# Altium PCB GSM_PCB_V4.PcbDoc
Units mm, origin at the board's own origin, x right, y up, seen from the top; angles counter-clockwise.
Board outline 55 x 60 mm, 2 copper layers (Top Layer, Bottom Layer), stack 1.569 mm thick; 82 components, 76 nets, 269 pads, 84 vias.
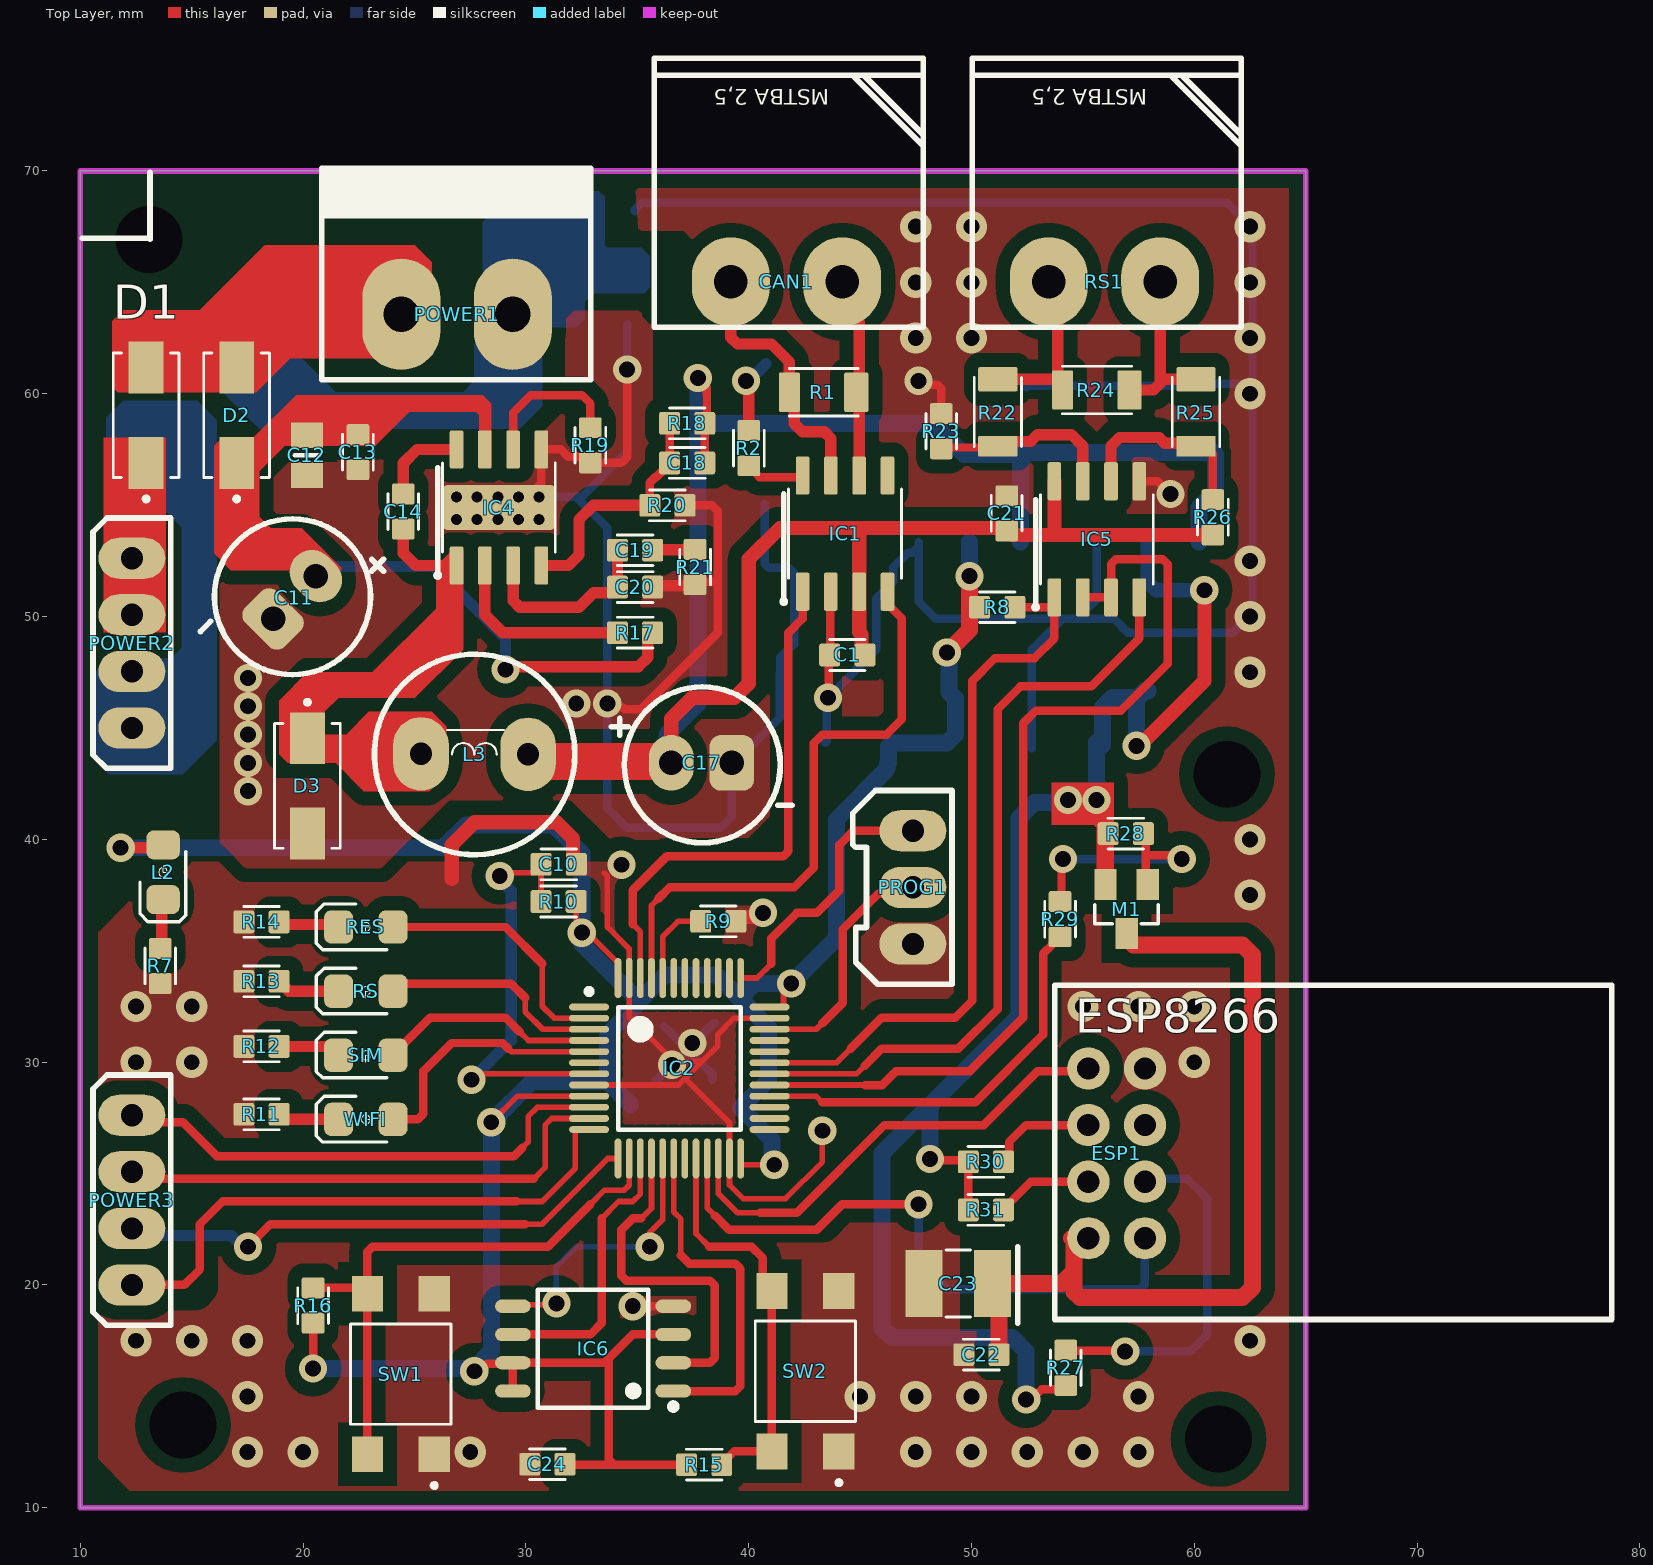
[diagram p0: Top Layer view]
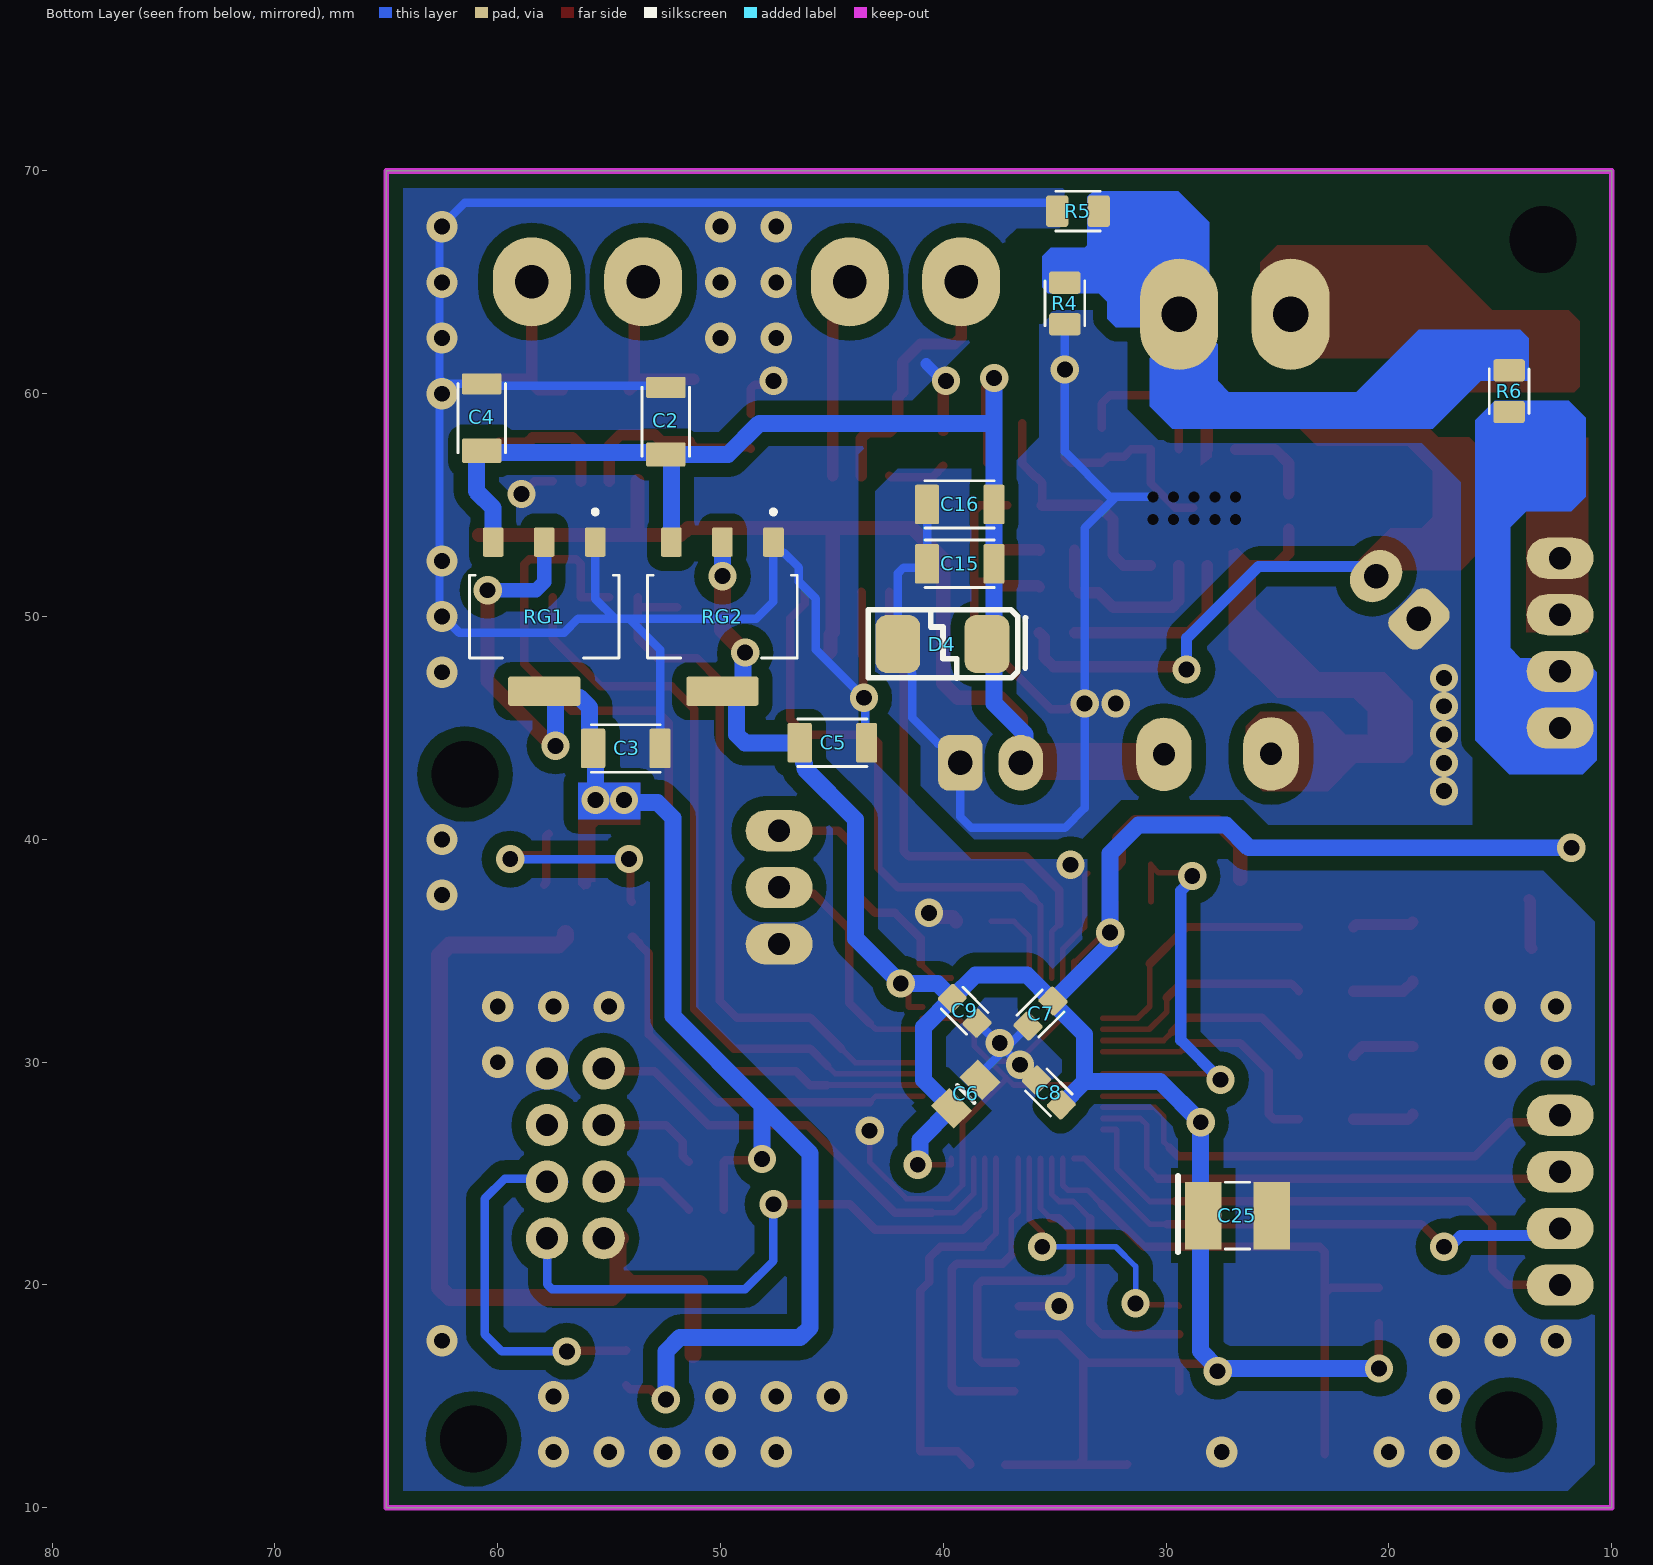
[diagram p1: Bottom Layer view, seen from below]
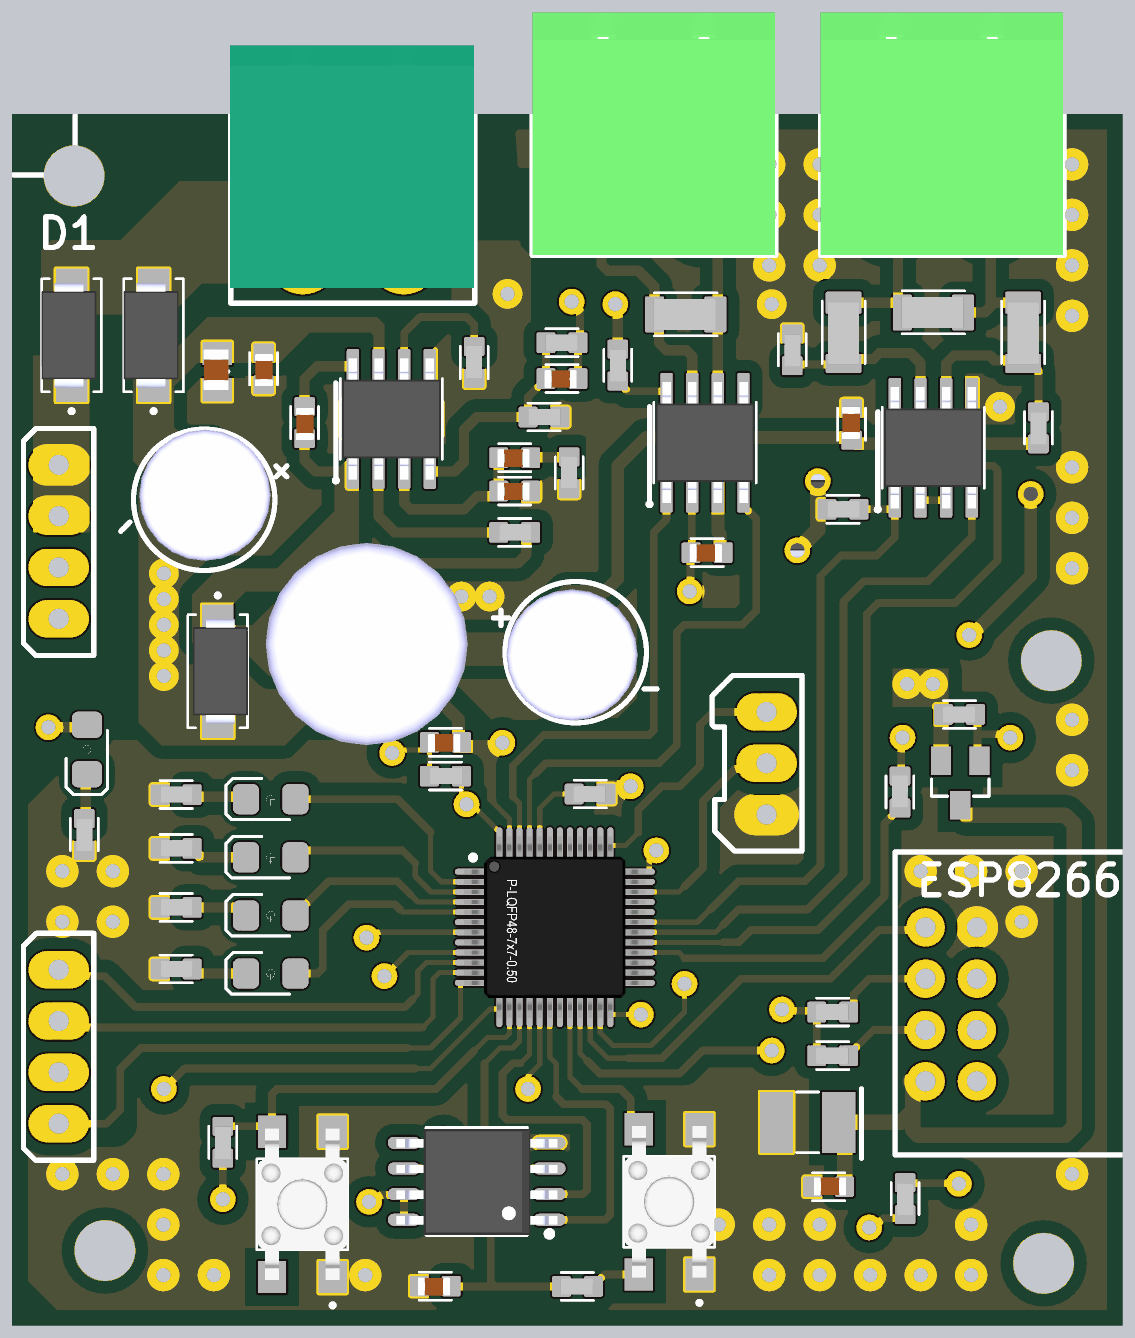
[diagram p2: 3D render of the assembled board from above, using the file's embedded part models]
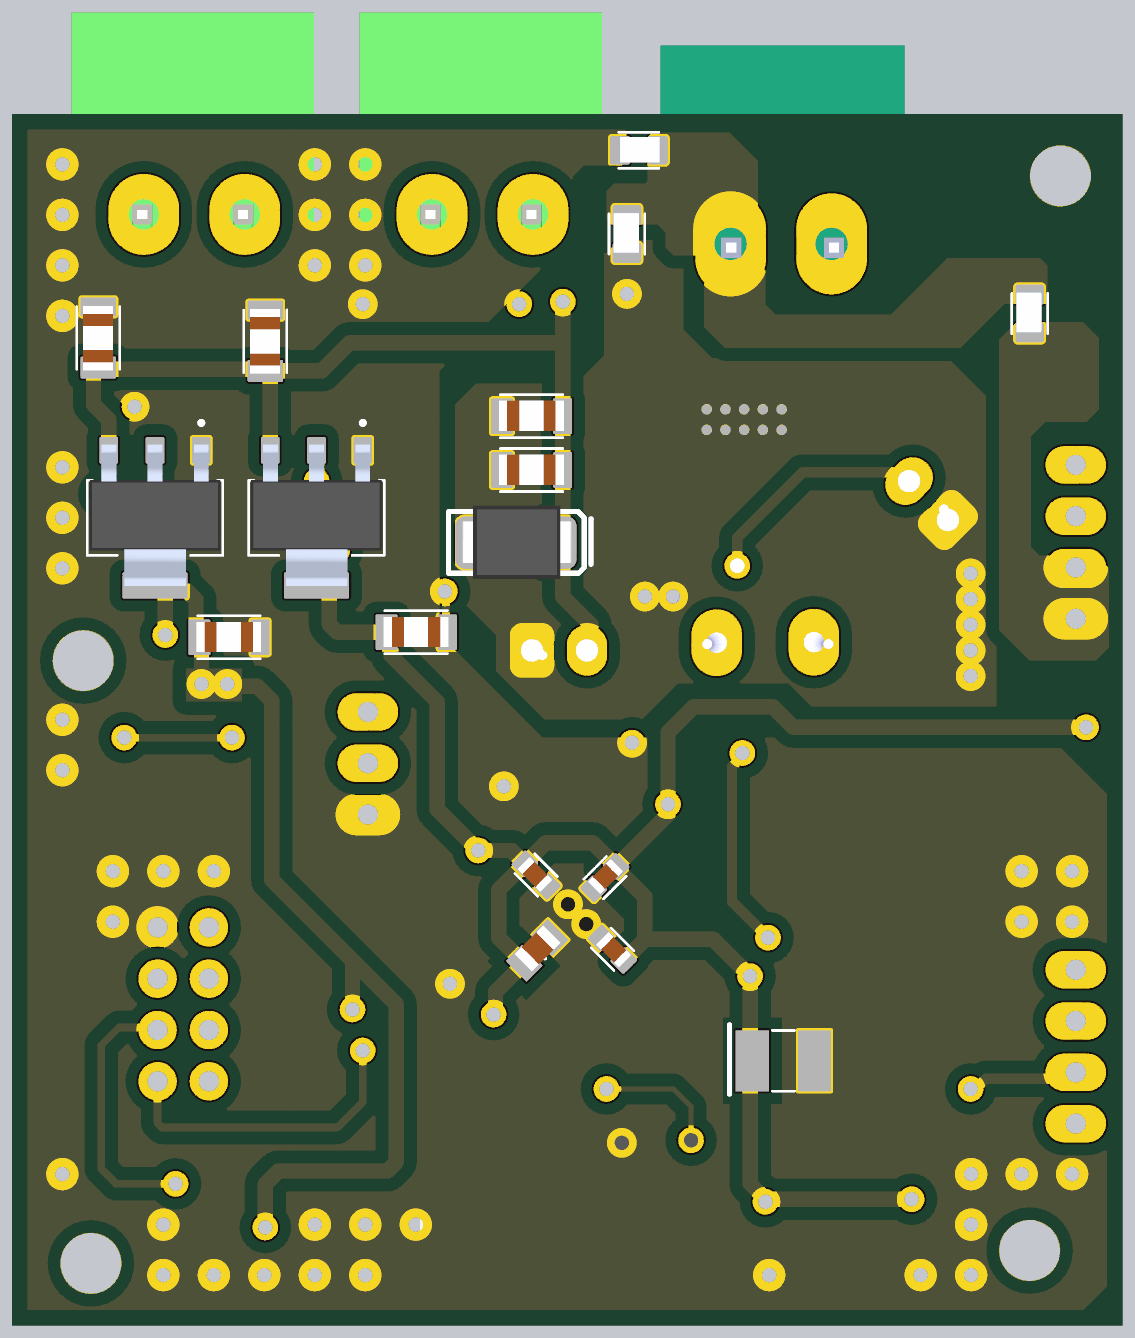
[diagram p3: 3D render of the assembled board from below, using the file's embedded part models]

## Layer stack, top to bottom
Top Solder: solder mask 0.0254, SM-001, Dk 4
Top Layer: signal copper 0.035
Dielectric 1: core 1.4986, Core-043, Dk 4.3
Bottom Layer: signal copper 0.035
Bottom Solder: solder mask 0.0254, SM-001, Dk 4

## Board outline
10,10 10,70 65,70 65,10

## Design rules (kind name [scope] priority, off if disabled: settings)
Clearance Clearance_1 [InPolygon] p1: gap=0.635 ignorepadtopadclearanceinfootprint=FALSE
Clearance [All] p2: gap=0.178 ignorepadtopadclearanceinfootprint=FALSE
PolygonConnect [All] p1: connectstyle=Direct reliefconductorwidth=0.254 reliefentries=4 polygonreliefangle="90 Angle" airgapwidth=0.254
RoutingVias [All] p1: holewidth=0.711 width=1.27 viastyle="Through Hole" minholewidth=0.711 minwidth=1.27 maxholewidth=0.711 maxwidth=1.27
SolderMaskExpansion [All] p1: expansion=0.102 istentingtop=FALSE
Width [All] p1: maxlimit=2.54 minlimit=0.254 preferedwidth=0.254 minimp=50.000000 maximp=50.000000 favimp=50.000000
30 further rules are at their usual default settings.

## Classes and differential pairs
component class U_WIFI: C22 C23 ESP1 M1 R27 R28 R29 R30 R31
component class U_spi_flash: C24 IC6
component class U_rs485: C21 IC5 R22 R23 R24 R25 R26
component class U_POWER: C11 C12 C13 C14 C15 C16 C17 C18 C19 C20 D3 D4 IC4 L3 R17 R18 R19 R20 R21
component class U_mcu: C6 C7 C8 C9 C10 IC2 PROG1 R9 R10 R11 R12 R13 R14 R15 R16 RES RS SIM SW1 SW2 WIFI
component class U_can: C1 IC1 R1 R2
component class MAIN: C2 C3 C4 C5 C25 CAN1 D1 D2 L2 POWER1 POWER2 POWER3 R4 R5 R6 R7 R8 RG1 RG2 RS1

## Components (designator, comment, footprint, x,y, rotation, side; value= is the part's Value field where it differs from the comment)
C1 "100nF" CAP-0603 44.323,48.26 r180 top
C2 "10uF" CAP-1206 52.312,58.765 r90 bottom
C3 "10uF" CAP-1206 54.229,43.942 r180 bottom
C4 "10uF" CAP-1206 60.579,58.928 r90 bottom
C5 "10uF" CAP-1206 44.958,44.196 r180 bottom
C6 "1uF" CAP-0805 38.321,29.212 r315 bottom
C7 "100nF" CAP-0603 35.576,32.266 r135 bottom
C8 "100nF" CAP-0603 35.179,28.575 r225 bottom
C9 "100nF" CAP-0603 39.124,32.369 r45 bottom
C10 "2.2nF" CAP-0603 31.369,38.862 r180 top
C11 "100/35V" cap/330u/16v 18.651,49.893 r45 top
C12 "2.2uF" CAP-0805 20.193,58.166 r270 top
C13 "100nF" CAP-0603 22.479,57.277 r270 top
C14 "100nF" CAP-0603 24.511,54.61 r270 top
C15 "NU" CAP-1206 39.243,52.227 r180 bottom
C16 "22uF" CAP-1206 39.243,54.894 r180 bottom
C17 "100uF/16v" cap/330u/16v 39.243,43.434 r180 top
C18 "NU" CAP-0603 37.136,56.879 r180 top
C19 "100pF" CAP-0603 34.798,52.959 r180 top
C20 "NU" CAP-0603 34.798,51.308 r180 top
C21 "100nF" CAP-0603 51.562,54.737 r90 top
C22 "100nF" CAP-0603 50.546,16.891 r0 top
C23 "100UF-16V B" CAP_TANTAL_B 49.403,20.066 r180 top
C24 "100nF" CAP-0603 30.861,11.938 r180 top
C25 "100UF-16V B" CAP_TANTAL_B 26.797,23.114 r180 bottom
CAN1 "conector_2pin_power" "MSTBA 2,5" 39.196,65.024 r0 top
D1 "M7" DIOD/1N4007/SMD 12.954,56.877 r90 top
D2 "M7" DIOD/1N4007/SMD 17.018,56.877 r90 top
D3 "US1M" DIOD/1N4007/SMD 20.193,44.558 r270 top
D4 "5V" TVS-5V-SMD 42.037,48.768 r180 bottom
ESP1 "Esp8266" ESP8266 55.245,22.098 r0 top
IC1 "MCP2551" SOP-8 44.45,54.102 r90 top
IC2 "STM32F103C8T6" LQFP48-7x7-0.50 36.703,29.718 r0 top
IC4 "MP4560DN" SOP8_HIT 26.924,52.324 r90 top
IC5 "SN65LBC184D" SOP-8 55.753,53.848 r90 top
IC6 "W25QXX" SOIC-8PIN-280MIL 33.02,17.145 r180 top
L2 "G" LED/0805 13.716,37.301 r90 top
L3 "100uH" inductor-9*12 25.299,43.84 r0 top locked
M1 "AO340" AO3401A 56.835,37 r180 top
POWER1 "" CONECTOR/FONIX/2PIN 29.337,63.627 r180 top
POWER2 "" CONECTOR/XH/4PIN 12.319,45 r90 top locked
POWER3 "" CONECTOR/XH/4PIN 12.319,20 r90 top
PROG1 "XH3" XH3 47.347,35.33 r90 top
R1 "120" RES/1206 43.362,60.202 r180 top
R2 "10K" RES/0603 40.005,57.658 r90 top
R4 "0R" RES/0805 35.477,65.102 r270 bottom
R5 "0R" RES/0805 32.907,69.132 r0 bottom
R6 "0R" RES/0805 15.538,61.165 r270 bottom
R7 "2.2K" RES/0603 13.589,34.417 r90 top
R8 "1K" RES/0603 51.054,50.419 r180 top
R9 "0R" RES/0603 38.735,36.322 r0 top
R10 "4.7k" RES/0603 31.369,37.211 r180 top
R11 "1.5K" RES/0603 18.034,27.659 r180 top
R12 "1.5K" RES/0603 18.034,30.707 r180 top
R13 "1.5K" RES/0603 18.034,33.628 r180 top
R14 "1.5K" RES/0603 18.034,36.295 r180 top
R15 "1.5K" RES/0603 38.1,11.938 r0 top
R16 "1.5K" RES/0603 20.447,19.177 r90 top
R17 "47K" RES/0603 34.798,49.276 r180 top
R18 "220K" RES/0603 37.338,58.674 r0 top
R19 "470k" RES/0603 32.893,57.587 r270 top
R20 "42.2K" RES/0603 36.251,54.991 r180 top
R21 "47K" RES/0603 37.592,52.126 r270 top
R22 "10R" RES/1206 51.054,59.182 r270 top
R23 "1K" RES/0603 48.641,58.42 r90 top
R24 "120" RES/1206 55.626,60.299 r180 top
R25 "10R" RES/1206 59.944,59.182 r270 top
R26 "1K" RES/0603 60.833,54.554 r90 top
R27 "1K" RES/0603 54.229,16.383 r90 top
R28 "100K" RES/0603 57.023,40.259 r0 top
R29 "100R" RES/0603 53.975,36.322 r270 top
R30 "1K" RES/0603 50.744,25.527 r0 top
R31 "1K" RES/0603 50.744,23.368 r0 top
RES "" LED/0805 21.59,36.068 r0 top
RG1 "AMS1117" AMS1117 57.912,50.249 r270 bottom
RG2 "AMS1117" AMS1117 49.915,50.249 r270 bottom locked
RS "" LED/0805 21.59,33.189 r0 top
RS1 "conector_2pin_power" "MSTBA 2,5" 53.467,65.024 r0 top
SIM "" LED/0805 21.59,30.31 r0 top
SW1 "" micro_switch_smd 24.384,16.002 r90 top
SW2 "" micro_switch_smd 42.545,16.129 r90 top
WIFI "" LED/0805 21.59,27.432 r0 top

## Footprints (in the part's own frame and the unit in brackets; to place one, negate y for a bottom-side part, rotate by r counter-clockwise, add the part's x,y. Pads: shape width x height; smd on the part's side, far side on the other; paste and mask are expansions set on the pad)
AMS1117 [mm]
  rrect15% 1.31x0.93 smd: 1(-3.091,2.29) 2(-3.091,0) 3(-3.091,-2.29)
  rrect15% 1.31x3.24 smd: 4(3.599,0)
  silkscreen extent -4.55,-3.36 2.11,3.36, body extent -3.37,-3.25 3.63,3.25, height 1.73
AO3401A [mm]
  rect 1x1.4 smd: D(-0.127,1.227) G(-1.077,-0.973) S(0.823,-0.973)
  silkscreen extent -1.55,-0.06 1.3,0.79
CAP-0603 [mm]
  rrect20% 0.94x1.02 smd: 1(-0.893,-0.017) 2(0.687,-0.017)
  silkscreen extent -0.9,-0.71 0.7,0.67, body extent -0.84,-0.44 0.76,0.46, height 0.77
CAP-0805 [mm]
  rect 1.15x1.45 smd: 1(0.025,-0.022) 2(1.825,-0.022)
  silkscreen extent 0.93,-0.57 0.93,0.53, body extent -0.17,-0.71 1.84,0.54, height 0.94
CAP-1206 [mm]
  rrect14% 1.09x1.77 smd: 1(-1.488,0.139)
  rrect14% 0.94x1.77 smd: 2(1.517,0.139)
  silkscreen extent -1.57,-0.93 1.53,1.2, body extent -1.63,-0.6 1.57,0.9, height 1.6
cap/330u/16v [mm]
  oval 2x2.5 hole 1.1: +(2.72,0)
  rrect50% 2x2.5 hole 1.1: -(0,0)
  silkscreen extent -2.7,-3.41 5.4,3.59, body extent -1.74,-3.02 4.76,3.48, height 11
CAP_TANTAL_B [mm]
  rect 1.651x3.02 smd: +(-1.54,0) -(1.54,0)
  silkscreen extent -2.67,-1.65 0.55,1.78
CONECTOR/FONIX/2PIN [mm]
  oval 3.5x5 hole 1.6: 1(-0.073,0.063) 2(4.927,0.063)
  silkscreen extent -3.58,-6.5 8.5,3, body extent -3.54,-9.75 8.54,2.25, height 3
CONECTOR/XH/4PIN [mm]
  oval 1.85x3 hole 1: 1(0,0) 2(2.54,0) 3(5.08,0) 4(7.62,0)
  silkscreen extent -1.81,-1.73 9.43,1.75
DIOD/1N4007/SMD [mm]
  rect 2.33x1.56 smd: A(4.299,0) K(0.019,0)
  silkscreen extent -1.7,-1.48 4.96,1.48, body extent -0.44,-1.24 4.76,1.49, height 2.6
ESP8266 [mm]
  round 1.9 hole 1: 3.3(0,0) CH_PD(0,5.08) GND(2.54,7.62) GPIO0(2.54,2.54) GPIO2(2.54,5.08) RST(0,2.54) RX(2.54,0) TX(0,7.62)
  silkscreen extent -1.51,-3.65 23.49,11.35
inductor-9*12 [mm]
  oval 2.5x3.3 hole 1: 1(-0.01,0) 2(4.8,-0.025)
  silkscreen extent -2.1,-4.52 6.9,4.47, body extent -2.73,-5.09 7.27,4.91, height 12
LED/0805 [mm]
  rrect50% 1.3x1.5 smd: A(2.45,0) K(0,0)
  silkscreen extent -0.99,-1.02 2.16,1.03
LQFP48-7x7-0.50 [mm]
  oval 1.8x0.3 smd: 1(-3.867,2.757) 2(-3.867,2.257) 3(-3.867,1.757) 4(-3.867,1.257) 5(-3.867,0.757) 6(-3.867,0.257) 7(-3.867,-0.243) 8(-3.867,-0.743) 9(-3.867,-1.243) 10(-3.867,-1.743) 11(-3.867,-2.243) 12(-3.867,-2.743) 25(4.233,-2.743) 26(4.233,-2.243) 27(4.233,-1.743) 28(4.233,-1.243) 29(4.233,-0.743) 30(4.233,-0.243) 31(4.233,0.257) 32(4.233,0.757) 33(4.233,1.257) 34(4.233,1.757) 35(4.233,2.257) 36(4.233,2.757)
  oval 0.3x1.8 smd: 13(-2.567,-4.043) 14(-2.067,-4.043) 15(-1.567,-4.043) 16(-1.067,-4.043) 17(-0.567,-4.043) 18(-0.067,-4.043) 19(0.433,-4.043) 20(0.933,-4.043) 21(1.433,-4.043) 22(1.933,-4.043) 23(2.433,-4.043) 24(2.933,-4.043) 37(2.933,4.057) 38(2.433,4.057) 39(1.933,4.057) 40(1.433,4.057) 41(0.933,4.057) 42(0.433,4.057) 43(-0.067,4.057) 44(-0.567,4.057) 45(-1.067,4.057) 46(-1.567,4.057) 47(-2.067,4.057) 48(-2.567,4.057)
  silkscreen extent -3.99,-2.74 2.93,3.58, body extent -4.32,-4.49 4.68,4.51, height 1.4
micro_switch_smd [mm]
  rect 1.6x1.4 smd: 1(-3.6,1.5) 1(3.6,1.5) 2(-3.6,-1.5) 2(3.6,-1.5)
  silkscreen extent -5.1,-2.25 2.25,2.25, body extent -3.75,-2.25 3.75,2.25, height 3.7
"MSTBA 2,5" [mm]
  oval 3.5x4 hole 1.5: 1(5,0) 2(0,0)
  silkscreen extent -3.43,-2.03 8.64,10.03, body extent -3.42,-2.01 8.58,9.99, height 8.57
RES/0603 [mm]
  rrect20% 0.94x1.02 smd: 1(-0.889,0) 2(0.691,0)
  silkscreen extent -0.9,-0.69 0.7,0.69, body extent -0.93,-0.41 0.67,0.39, height 0.43
RES/0805 [mm]
  rrect25% 1x1.42 smd: 1(0.113,0.933) 2(1.983,0.933)
  silkscreen extent 0.05,0.04 2.05,1.82, body extent 0,0.28 2,1.53, height 0.6
RES/1206 [mm]
  rrect14% 1.09x1.77 smd: 1(-1.469,0.131)
  rrect14% 0.94x1.77 smd: 2(1.536,0.131)
  silkscreen extent -1.55,-0.93 1.55,1.2, body extent -1.51,-0.64 1.59,0.91, height 0.55
SOIC-8PIN-280MIL [mm]
  oval 1.6x0.6 smd: 1(-3.596,1.905) 2(-3.596,0.635) 3(-3.596,-0.635) 4(-3.596,-1.905) 5(3.604,-1.905) 6(3.604,-0.635) 7(3.604,0.635) 8(3.604,1.905)
  silkscreen extent -3.82,-2.65 2.48,2.82, body extent -3.99,-2.59 3.99,2.65, height 2.16
SOP8_HIT [mm]
  rrect25% 1.71x0.61 smd: 1(-0.034,0.038) 2(-0.034,-1.232) 3(-0.034,-2.502) 4(-0.034,-3.772) 5(5.176,-3.772) 6(5.176,-2.502) 7(5.176,-1.232) 8(5.176,0.038)
  round 0 hole 0.5: 5(2.032,-2.743) 5(2.032,-1.816) 5(2.032,-0.889) 5(2.032,0.038) 5(2.032,-3.67) 5(3.048,-2.743) 5(3.048,-1.816) 5(3.048,-0.889) 5(3.048,0.038) 5(3.048,-3.67)
  rrect25% 2.032x5.08 smd: 5(2.571,-1.867)
  silkscreen extent -0.58,-4.4 4.57,0.98, body extent -0.43,-4.32 5.57,0.58, height 1.75
SOP-8 [mm]
  rrect25% 1.71x0.61 smd: 1(-2.986,2.032) 2(-2.986,0.762) 3(-2.986,-0.508) 4(-2.986,-1.778) 5(2.224,-1.778) 6(2.224,-0.508) 7(2.224,0.762) 8(2.224,2.032)
  silkscreen extent -3.53,-2.4 1.62,2.98, body extent -3.38,-2.32 2.62,2.58, height 1.75
TVS-5V-SMD [mm]
  rrect50% 2x2.6 smd: 1(4,0) 2(0,0)
  silkscreen extent -1.33,-1.53 5.72,1.54, body extent -0.66,-1.79 4.74,1.83, height 2.43
XH3 [mm]
  oval 1.85x3 hole 1: 1(-0.024,-0.024) 2(2.516,-0.024) 3(5.056,-0.024)
  silkscreen extent -1.83,-1.78 6.87,2.67

## Part data
C1 C2 C3 C4 C5 C6 C7 C8 C9 C10 C12 C13 C14 C15 C16 C18 C19 C20 C21 C22 C24: library part cap_smd
C11 C17 C23 C25: library part cap-electrolit
D1 D2 D3: library part DIOD/RECTIFIERS
D4: library part TVS-SMD
IC6: library part w25qxx
L2 RES RS SIM WIFI: library part LED-1COLER
L3: library part inductor
M1: library part MOSFET_P_CH
POWER1: library part CONECTOR/FONIX/2PIN
POWER2 POWER3: library part CONECTOR/XH/4PIN
R1 R2 R4 R5 R6 R7 R8 R9 R10 R11 R12 R13 R14 R15 R16 R17 R18 R19 R20 R21 R22 R23 R24 R25 R26 R27 R28 R29 R30 R31: library part RES/SMD
SW1 SW2: library part micro_sw

## Free pads (board coordinates)
  round 1.524 hole 3: 11(13.081,66.929) 11(14.605,13.716) 11(61.087,13.081) 11(61.468,42.926)

## Via types
v1: diameter 1.27, hole 0.711, Top Layer to Bottom Layer, 44 vias
v2: diameter 1.4, hole 0.711, Top Layer to Bottom Layer, 40 vias

## Nets (pads, with @x,y where several pads share a name; then routed paths per layer and width w, separated by ;. In a path a pad name is that pad's centre, name@x,y a point inside that pad or via, vN(x,y) a via of type N, cw(c..) or ccw(c..) an arc to the next point about the centre after c; other vN are vias at no path point)
+3.3: C5.1 C6.2 C7.2 C8.2 C9.2 C24.1 C25.+ IC2.9 IC2.24 IC2.36 IC2.48 IC6.3 IC6.7 IC6.8 L2.A R8.2 R10.1 R15.1 R16.1 RG2.2 RG2.4 | length 139.9
  Top Layer w0.254: v1(28.448,27.305) 29.618,28.475 IC2.9 ; R10.1 32.258,36.068 v1(32.512,35.814) 32.766,35.814 34.046,34.534 34.115,34.534 34.136,34.513 IC2.48 ; IC2.24 39.636,25.421 39.657,25.4 v1(41.148,25.4) ; IC2.36 41.538,32.475 41.559,32.497 41.559,33.177 v1(41.91,33.528)
  Top Layer w0.381: L2.A@13.589,39.624 L2.A ; v1(20.447,16.256) R16.1 ; v1(27.686,16.129) 27.927,16.129 28.266,16.468 29.374,16.468 IC6.7 ; IC6.8 IC6.7 ; C24.1 31.771,11.938 33.942,11.938 ; IC6.3 34.798,17.78 33.718,16.7 ; R15.1 33.942,11.938 ; IC6.7 33.528,16.51 33.718,16.7 ; 33.718,16.7 33.718,12.161 33.942,11.938
  Top Layer w0.508: v1(11.811,39.624) L2.A@13.589,39.624
  Top Layer w0.762: v1(48.895,48.387) 49.911,49.403 v1(49.911,51.816)
  Bottom Layer w0.762: v1(11.811,39.624) 26.289,39.624 27.305,40.64 31.242,40.64 32.512,39.37 v1(32.512,35.814) 32.512,35.306 C7.2 ; v1(20.447,16.256) 27.422,16.256 27.549,16.129 v1(27.686,16.129) 27.686,16.266 28.448,17.028 28.448,23.114 v1(28.448,27.305) 30.27,29.127 33.655,29.127 ; C8.2 33.655,29.127 ; v1(41.148,25.4) 41.051,25.497 41.051,26.513 C6.2 40.894,29.204 40.894,31.571 C9.2 ; v1(48.895,48.387) 48.98,48.302 48.98,46.609 49.276,46.313 49.276,44.707 48.904,44.335 C5.1 46.282,44.171 46.282,43.449 46.218,43.385 46.218,43.17 43.942,40.894 43.942,35.56 v1(41.91,33.528) 40.259,33.528 C9.2 ; v1(49.911,51.816) 49.913,51.818 49.913,53.338 RG2.2 ; 33.655,29.127 33.655,31.242 35.116,32.703 35.116,32.778 36.247,33.909 38.556,33.909 C9.2
+3.3_wifi: C3.1 M1.S R27.1 R28.1 R30.1 R31.1 RG1.2 RG1.4 | length 72.5
  Top Layer w0.381: v1(48.133,25.654) 48.197,25.59 49.791,25.59 R30.1 R31.1 ; v1(52.451,14.859) 52.692,14.859 53.147,15.315 54.05,15.315 R27.1 ; v1(55.613,41.77) 55.613,40.802 55.836,40.579 55.854,40.579 56.073,40.36 56.073,38.034 M1.S
  Top Layer w0.635: v1(57.404,44.196) 57.531,44.196 60.452,47.117 v1(60.452,51.181)
  Bottom Layer w0.635: RG1.2 57.912,51.553 58.284,51.181 v1(60.452,51.181)
  Bottom Layer w0.762: v1(48.133,25.654) 48.133,28.067 ; v1(52.451,14.859) 52.451,17.018 51.816,17.653 46.42,17.653 45.974,18.099 45.974,25.908 48.133,28.067 ; C3.1@55.647,44.351 55.613,44.351 v1(55.613,41.77) 55.499,41.656 52.832,41.656 52.133,40.957 52.133,32.067 48.133,28.067 ; C3.1 55.881,44.245 55.881,45.93 56.327,46.376 57.489,46.376 57.763,46.65 RG1.4 ; v1(57.404,44.196) RG1.4@57.404,46.313
  other v1: 54.332,41.77
+5: C1.1 C2.1 C4.1 C15.2 C16.2 C17.+ C18.1 C21.1 D4.1 IC1.3 IC5.8 L3.2 R18.2 R26.1 RG1.3 RG2.3 | length 95.8
  Top Layer w0.381: v1(37.719,60.706) 38.126,60.299 38.126,59.97 ; C18.1 R18.2 38.128,58.773 38.128,59.967
  Top Layer w0.635: C17.+ 36.523,45.413 37.465,46.355 39.37,46.355 40.005,46.99 40.005,52.578 41.402,53.975 45.085,53.975 ; C1.1 45.063,48.43 45.063,49.203 44.958,49.308 IC1.3 44.958,53.848 45.085,53.975 ; IC5.8 53.721,53.665 ; R26.1 53.721,53.665 ; 45.085,53.975 51.448,53.975 C21.1 51.619,53.844 51.798,53.665 53.721,53.665
  Bottom Layer w0.762: C17.+ 36.322,43.635 36.322,44.704 37.726,46.108 C15.2 C16.2 37.726,58.674 ; v1(37.719,60.706) 37.726,60.699 37.726,58.674 ; RG2.3 52.205,57.031 C2.1 ; RG1.3 60.202,54.868 60.96,55.626 60.96,57.272 C4.1@60.689,57.543 ; C4.1 60.637,57.359 52.533,57.359 C2.1 ; 37.726,58.674 48.26,58.674 49.657,57.277 C2.1
+24: C11.+ C12.1 C13.1 D2.K IC4.7 R17.1 | length 38.8
  Top Layer w0.508: 18.796,52.705 18.218,52.705 17.018,53.905 D2.K 17.018,57.281 17.544,57.807 18.691,57.807 19.054,58.17 20.171,58.17 C13.1 22.5,58.208 23.41,58.208 24.638,59.436 27.858,59.436 28.156,59.138 IC4.7 ; v1(29.083,47.625) 29.21,47.752 35.052,47.752 35.471,48.171 35.471,49.06 R17.1
  Bottom Layer w0.508: C11.+ 20.574,51.952 20.872,52.25 25.855,52.25 29.083,49.022 v1(29.083,47.625)
+24_GSM: D1.K POWER2.3 POWER2.4 | length 11.4
  Top Layer w0.508: POWER2.3 12.334,50.08 12.954,50.7 D1.K POWER2.4@12.954,52.62
CAN1_RX: IC1.4 IC2.45 | length 27.2
  Top Layer w0.254: IC2.45 35.636,37.033 35.941,37.338
  Top Layer w0.381: 35.941,37.338 36.449,37.846 42.037,37.846 42.926,38.735 42.926,44.323 43.307,44.704 46.186,44.704 46.863,45.381 46.863,49.931 46.228,50.566 IC1.4
CAN1_TX: IC1.1 IC2.46 | length 23.7
  Top Layer w0.254: 34.798,36.195 35.136,35.857 IC2.46
  Top Layer w0.381: 34.798,36.195 34.798,37.719 36.322,39.243 41.56,39.243 41.783,39.466 41.783,49.276 42.418,49.911 IC1.1
CAN_1_N: CAN1.1 IC1.6 R1.1 | length 9
  Top Layer w0.508: CAN1.1 44.196,63.964 44.958,63.202 IC1.6
CAN_1_P: CAN1.2 IC1.7 R1.2 | length 12
  Top Layer w0.508: CAN1.2 39.196,62.531 39.497,62.23 41.021,62.23 41.826,61.425 R1.2 42.042,59.855 42.042,58.669 42.418,58.293 43.39,58.293 43.688,57.995 IC1.7
CLK_5: IC2.15 IC6.6 | length 12.7
  Top Layer w0.254: 33.401,22.987 34.163,23.749 34.798,23.749 35.136,24.087 IC2.15
  Top Layer w0.381: IC6.6 32.893,17.78 33.401,18.288 33.401,22.987
CS_5: IC2.18 IC6.1 | length 15.6
  Top Layer w0.254: IC2.18 36.636,23.28 36.957,22.96 36.957,21.336
  Top Layer w0.381: IC6.1@36.804,15.24 39.401,15.24 39.624,15.463 39.624,20.732 39.401,20.955 37.338,20.955 36.957,21.336
ESP-RX: ESP1.RX IC2.21 | length 28
  Top Layer w0.254: IC2.21 38.136,23.459 38.481,23.114
  Top Layer w0.381: 38.481,23.114 39.116,22.479 43.053,22.479 44.196,23.622 v1(47.625,23.622)
  Bottom Layer w0.381: v1(47.625,23.622) 47.625,21.082 48.895,19.812 57.562,19.812 57.785,20.035 ESP1.RX
ESP_ON: IC2.28 R29.2 | length 18.4
  Top Layer w0.254: IC2.28 43.026,28.475 43.307,28.194
  Top Layer w0.381: 43.307,28.194 50.165,28.194 53.213,31.242 53.213,34.869 53.655,35.311 53.655,35.351 53.935,35.631 R29.2
ESP_TX: ESP1.TX IC2.22 | length 20.5
  Top Layer w0.254: IC2.22 38.636,24.102 39.497,23.241 40.513,23.241
  Top Layer w0.381: 40.513,23.241 42.164,23.241 46.101,27.178 50.546,27.178 52.961,29.593 54.358,29.593 ESP1.TX@54.483,29.718
GND: POWER1.1 R4.1 R5.1 R6.1 | length 28.8
  Bottom Layer w0.381: R6.1 19.339,61.052 20.955,59.436 29.495,59.436 29.718,59.659 29.718,63.256 POWER1.1 29.97,64.124 31.866,64.124 33.02,65.278 ; R5.1 33.02,65.278 ; R4.1 33.309,64.989 33.02,65.278
GND_D: C1.2 C2.2 C3.2 C4.2 C5.2 C6.1 C7.1 C8.1 C9.1 C10.1 C21.2 C22.1 C23.- C24.2 C25.- ESP1.GND IC1.2 IC2.8 IC2.23 IC2.35 IC2.47 IC5.5 IC6.4 PROG1.1 R2.2 R5.2 R7.1 R9.2 R11.2 R12.2 R13.2 R14.2 R23.2 RG1.1 RG2.1 SW1.2 SW2.2 | length 159.6
  Top Layer w0.254: IC2.8 36.849,28.975 37.211,29.337 ; 33.528,38.481 33.655,38.354 33.655,36.068 34.636,35.087 IC2.47 34.636,32.039 36.639,30.035 37.91,30.035 ; IC2.35 39.341,31.975 38.608,31.242 38.608,30.734 37.91,30.035 ; v1(43.307,26.924) 43.307,25.527 41.656,23.876 39.751,23.876 39.136,24.491 IC2.23 39.136,27.285 37.211,29.21 37.211,29.337 ; 37.211,29.337 37.91,30.035
  Top Layer w0.381: v1(34.798,19.05) IC6.4 ; v1(43.561,46.355) 43.599,46.393 43.599,48.24 C1.2 43.662,48.303 43.662,51.09 IC1.2 ; v1(47.625,60.579) 47.795,60.409 48.461,60.409 48.641,60.229 R23.2 ; IC5.5 58.355,56.072 v1(58.928,55.499)
  Top Layer w0.508: v1(39.878,60.579) 40.005,60.452 R2.2
  Top Layer w0.635: 26.67,38.227 26.67,39.751 27.686,40.767 31.369,40.767 32.109,40.027 32.109,39.032 C10.1 ; R9.2 39.426,36.362 39.579,36.515 40.28,36.515 40.468,36.703 v1(40.64,36.703)
  Bottom Layer w0.381: R5.2 34.89,68.27 35.2,68.58 61.468,68.58 62.611,67.437 v2@62.611,60.675 ; C8.1 35.874,29.194 v1@37.249,30.569 ; C7.1 v1@37.249,30.569 ; C6.1 38.354,29.464 v1@37.249,30.569 ; C9.1 38.43,31.75 v1@37.249,30.569 ; C5.2 43.501,44.395 43.501,46.295 v1(43.561,46.355) 45.72,48.514 45.72,50.8 46.482,51.562 46.482,52.197 47.161,52.876 47.35,52.876 RG2.1@47.625,53.15 ; RG2.1 RG2.1@47.625,53.15 ; C2.2 52.533,60.364 60.637,60.364 60.725,60.452 62.388,60.452 v2@62.611,60.675 ; C3.2 52.712,48.521 54.102,49.911 ; RG1.1 55.622,50.796 54.737,49.911 ; RG2.1@47.625,53.15 47.625,50.673 48.387,49.911 54.102,49.911 ; 54.102,49.911 54.737,49.911 ; 54.737,49.911 56.388,49.911 57.023,49.276 61.722,49.276 62.611,50.165 v2@62.611,60.675
  Bottom Layer w0.508: v1(39.878,60.579) 40.005,60.579 40.767,61.341
  other v1: 36.561,29.882 37.465,30.861 34.29,38.862
  other v2: 17.5,12.5 20,12.5 27.5,12.5 47.5,12.5 50,12.5 52.5,12.5 55,12.5 57.5,12.5 17.5,15 45,15 47.5,15 50,15 57.5,15 12.5,17.5 15,17.5 17.5,17.5 62.5,17.5 12.5,30 15,30 60,30 12.5,32.5 15,32.5 55,32.5 57.5,32.5 60,32.5 62.5,37.5 62.5,40 62.5,47.5 62.5,50 62.5,52.5 62.5,60 47.5,62.5 50,62.5 62.5,62.5 47.5,65 50,65 62.5,65 47.5,67.5 50,67.5 62.5,67.5
GND_GSM: POWER2.1 POWER2.2 R6.2 | length 16.1
  Bottom Layer w0.381: POWER2.1 POWER2.2 14.393,47.54 14.732,47.879 14.732,58.674 R6.2@14.605,58.801
GND_SW: C11.- C12.2 C13.2 C15.1 C16.1 C17.- C20.1 D3.A D4.2 IC4.5 R4.2 R19.2 R20.1 R21.2 | length 76.2
  Top Layer w0.381: IC4.5@28.791,54.895 29.596,54.895 30.696,55.995 30.696,57.5 31.572,57.5 31.897,57.176 32.613,57.176 R19.2 34.29,56.896 34.544,57.15 v1(34.544,61.087) ; v1(33.655,46.101) 33.825,45.931 34.333,45.931 34.417,45.847 35.179,45.847 38.608,49.276 38.608,51.689 ; R20.1 38.354,54.991 38.608,54.737 38.608,51.689 ; R21.2 37.719,51.562 38.481,51.562 38.608,51.689
  Top Layer w0.508: C20.1 35.746,51.38 37.537,51.38 R21.2
  Bottom Layer w0.381: 30.594,55.372 32.258,55.372 ; R4.2 v1(34.544,61.087) 34.544,57.404 32.512,55.372 32.258,55.372 ; C16.1 C15.1 40.9,52.197 41.783,52.197 42.037,51.943 D4.2 41.419,48.15 41.419,47.452 41.402,47.435 41.402,45.466 40.238,44.302 40.029,44.302 39.243,43.516 39.243,41.021 38.735,40.513 34.544,40.513 33.655,41.402 v1(33.655,46.101) 33.655,53.975 32.385,55.245 32.258,55.372
  other v1: 17.526,42.164 17.526,43.434 17.526,44.704 17.526,45.974 32.258,46.101 17.526,47.244
GPIO0_6: ESP1.GPIO0 R27.2 | length 16.8
  Top Layer w0.381: R27.2 54.257,17.046 56.868,17.046 v1(56.896,17.018)
  Bottom Layer w0.381: v1(56.896,17.018) 59.817,17.018 60.579,17.78 60.579,23.876 59.69,24.765 57.912,24.765 ESP1.GPIO0 ESP1.GPIO0@57.023,24.638
GSM_EN_1: IC2.11 POWER3.3 | length 22.8
  Top Layer w0.254: 30.353,24.765 30.861,25.273 30.861,27.178 31.158,27.475 IC2.11
  Top Layer w0.381: POWER3.3@12.319,24.765 30.353,24.765
MISO_5: IC2.16 IC6.2 | length 15.5
  Top Layer w0.254: 35.179,22.987 35.636,23.444 IC2.16
  Top Layer w0.381: 35.179,22.987 34.798,22.987 34.29,22.479 34.29,20.416 34.513,20.193 38.258,20.193 38.481,19.97 38.481,16.733 38.258,16.51 IC6.2@36.747,16.51
MOSI_5: IC2.17 IC6.5 | length 12.4
  Top Layer w0.254: IC6.5 29.479,19.113 31.305,19.113 v1(31.369,19.177) ; v1(35.56,21.717) 35.56,22.352 36.136,22.928 IC2.17
  Bottom Layer w0.254: v1(31.369,19.177) 31.369,20.828 32.258,21.717 v1(35.56,21.717)
NetC14_1: C14.1 IC4.8 | length 4
  Top Layer w0.508: C14.1 24.494,56.879 25.115,57.5 IC4.8
NetC14_2: C14.2 D3.K IC4.1 L3.1 | length 21.9
  Top Layer w0.508: C14.2 24.494,52.849 25.053,52.29 IC4.1 26.886,48.857 25.019,46.99 21.209,46.99 20.387,46.168 20.387,44.733 D3.K 20.193,44.366 20.719,43.84 L3.1
NetC18_2: C18.2 IC4.4 R18.1 R20.2 | length 11
  Top Layer w0.381: R20.2 35.56,56.007 35.829,56.276 35.869,56.276 36.449,56.856 C18.2 R18.1
  Top Layer w0.508: IC4.4 31.911,52.29 32.385,52.764 32.385,54.356 33.02,54.991 R20.2
NetC19_1: C19.1 R21.1 | length 1.9
  Top Layer w0.508: C19.1 35.711,52.996 37.573,52.996 R21.1
NetC19_2: C19.2 C20.2 IC4.3 | length 8.1
  Top Layer w0.508: IC4.3 29.426,50.717 29.724,50.419 32.385,50.419 33.035,51.069 C20.2@33.895,51.069 ; C20.2 C19.2
NetC22_2: C22.2 C23.+ ESP1.3.3 M1.D | length 38.9
  Top Layer w0.762: C22.2 51.233,19.776 C23.+ 51.233,20.066 54.037,20.066 54.483,20.512 ; ESP1.3.3@54.483,22.098 54.61,21.971 54.61,20.512 54.61,20.066 54.61,19.685 54.864,19.431 62.165,19.431 62.611,19.877 62.611,34.817 62.165,35.263 57.272,35.263 56.962,35.573 M1.D
NetD1_A: D1.A D2.A POWER1.2 | length 12.4
  Top Layer w0.762: D1.A D2.A 17.996,61.176 20.384,63.564 POWER1.2
NetESP1_CH_PD: ESP1.CH_PD R30.2 | length 4.1
  Top Layer w0.381: R30.2 51.689,25.781 51.689,26.416 52.451,27.178 ESP1.CH_PD@54.483,27.178
NetESP1_GPIO2: ESP1.GPIO2
NetIC1_5: IC1.5
NetIC1_8: IC1.8 R2.1 | length 2.7
  Top Layer w0.381: R2.1 40.259,56.515 40.259,56.484 40.482,56.261 42.353,56.261 IC1.8
NetIC2_1: IC2.1
NetIC2_2: IC2.2 RES.A | length 11.6
  Top Layer w0.254: 30.734,34.417 30.734,32.512 31.271,31.975 IC2.2
  Top Layer w0.381: RES.A 29.083,36.068 30.734,34.417
NetIC2_3: IC2.3 RS.A | length 10.2
  Top Layer w0.254: 29.972,32.893 29.972,32.258 30.755,31.475 IC2.3
  Top Layer w0.381: RS.A 24.379,33.528 29.337,33.528 29.972,32.893
NetIC2_4: IC2.4 SIM.A | length 9.9
  Top Layer w0.254: 29.718,31.369 30.112,30.975 IC2.4
  Top Layer w0.381: SIM.A 24.04,30.338 24.572,30.87 25.28,31.578 25.706,32.004 29.083,32.004 29.718,31.369
NetIC2_5: IC2.5 WIFI.A | length 11.5
  Top Layer w0.254: 29.21,30.607 29.342,30.475 IC2.5
  Top Layer w0.381: WIFI.A@24.04,27.432 25.146,27.432 25.4,27.686 25.4,29.591 26.67,30.861 28.956,30.861 29.21,30.607
NetIC2_6: IC2.6
NetIC2_19: IC2.19
NetIC2_25: IC2.25
NetIC2_26: IC2.26
NetIC2_27: IC2.27
NetIC2_32: IC2.32
NetIC2_33: IC2.33
NetIC2_34: IC2.34 PROG1.2 | length 11
  Top Layer w0.254: IC2.34 43.032,31.475 43.307,31.75
  Top Layer w0.381: 43.307,31.75 44.226,32.669 44.226,35.971 45.82,37.565 47.09,37.565 PROG1.2
NetIC2_37: IC2.37 PROG1.3 | length 12.3
  Top Layer w0.254: IC2.37 40.379,33.775 41.021,34.417
  Top Layer w0.381: 41.021,34.417 41.021,35.56 42.164,36.703 43.053,36.703 44.069,37.719 44.069,39.751 44.704,40.386 PROG1.3
NetIC2_38: IC2.38
NetIC2_39: IC2.39
NetIC2_40: IC2.40
NetIC2_41: IC2.41
NetIC2_42: IC2.42
NetIC2_43: IC2.43
NetIC2_44: IC2.44 R9.1 | length 3.8
  Top Layer w0.254: IC2.44 36.136,35.628 36.83,36.322 R9.1
NetIC4_2: IC4.2 R17.2 | length 8.5
  Top Layer w0.508: IC4.2 28.156,50.082 28.962,49.276 R17.2
NetIC4_6: IC4.6 R19.1 | length 6.7
  Top Layer w0.381: IC4.6 29.426,59.144 30.226,59.944 32.512,59.944 32.893,59.563 R19.1
NetL2_K: L2.K R7.2 | length 2.2
  Top Layer w0.508: R7.2 13.652,35.171 13.652,37.238 L2.K
NetM1_G: M1.G R28.2 R29.1 | length 11.3
  Top Layer w0.381: R29.1 54.038,37.274 54.038,39.052 v1(54.102,39.116) ; R28.2 57.813,40.16 57.813,38.072 M1.G ; 57.912,39.286 59.266,39.286 v1(59.436,39.116)
  Bottom Layer w0.381: v1(54.102,39.116) v1(59.436,39.116)
NetR11_1: R11.1 WIFI.K | length 2.8
  Top Layer w0.508: R11.1 18.923,27.648 19.139,27.432 WIFI.K
NetR12_1: R12.1 SIM.K | length 2.8
  Top Layer w0.508: R12.1 21.199,30.707 21.59,30.316 SIM.K
NetR13_1: R13.1 RS.K | length 2.9
  Top Layer w0.508: R13.1 18.923,33.588 19.139,33.372 19.179,33.372 19.362,33.189 RS.K
NetR14_1: R14.1 RES.K | length 2.8
  Top Layer w0.508: R14.1 19.036,36.181 21.477,36.181 RES.K
PWR_1: IC2.10 POWER3.4 | length 22.7
  Top Layer w0.254: 29.845,26.162 30.099,26.416 30.099,27.559 30.515,27.975 IC2.10
  Top Layer w0.381: POWER3.4@12.319,27.305 14.605,27.305 16.129,25.781 29.464,25.781 29.845,26.162
RS485_1_N: R22.1 R24.2 RS1.2 | length 7.8
  Top Layer w0.508: R22.1 R24.2@53.874,60.651 ; RS1.2 53.874,64.617 R24.2@53.874,60.651 ; R24.2 53.874,60.385 R24.2@53.874,60.651
RS485_1_P: R24.1 R25.1 RS1.1 | length 7.7
  Top Layer w0.508: R24.1 58.169,60.169 58.467,60.466 58.467,60.651 ; RS1.1 58.467,60.651 ; R25.1 58.467,60.651
RS485_3_N: IC5.7 R22.2 R23.1 | length 8.4
  Top Layer w0.381: R23.1 48.698,57.588 51.127,57.588 R22.2 R22.2@51.401,57.862
  Top Layer w0.508: R22.2@51.401,57.862 52.655,57.862 52.959,58.166 54.483,58.166 54.991,57.658 IC5.7
RS485_3_P: IC5.6 R25.2 R26.2 | length 8.7
  Top Layer w0.381: R25.2 60.49,57.646 60.833,57.302 R26.2
  Top Layer w0.508: IC5.6 56.261,57.658 56.642,58.039 58.42,58.039 58.674,57.785 59.935,57.785 R25.2
RS_EN: IC2.29 IC5.2 IC5.3 | length 43.4
  Top Layer w0.254: IC2.29 45.231,28.975
  Top Layer w0.381: 45.231,28.975 45.993,28.975 46.609,29.591 49.911,29.591 52.324,32.004 52.324,45.212 52.895,45.783 56.706,45.783 58.801,47.879 58.801,52.355 58.578,52.578 56.484,52.578 56.261,52.355 IC5.3 IC5.2
RST_5: C10.2 IC2.7 R10.2 | length 19.2
  Top Layer w0.254: v1(27.559,29.21) 27.824,29.475 IC2.7 ; v1(28.829,38.354) 28.971,38.496 30.339,38.496 C10.2@30.68,38.837 ; R10.2 30.68,37.213 C10.2@30.68,38.837 ; C10.2 30.682,38.839 C10.2@30.68,38.837
  Bottom Layer w0.508: v1(27.559,29.21) 29.337,30.988 29.337,37.697 28.829,38.205 v1(28.829,38.354)
RST_6: ESP1.RST R31.2 | length 3.6
  Top Layer w0.381: R31.2 51.435,23.408 52.665,24.638 ESP1.RST@54.483,24.638
RX: IC2.31 IC5.1 R8.1 | length 32.7
  Top Layer w0.254: IC2.31 43.945,29.975 44.577,30.607
  Top Layer w0.381: 44.577,30.607 45.974,32.004 49.276,32.004 50.038,32.766 50.038,47.117 51.054,48.133 52.832,48.133 53.721,49.022 IC5.1@53.721,50.534 ; R8.1 53.606,50.419 IC5.1@53.721,50.534 ; IC5.1 IC5.1@53.721,50.534
RX_TO_GSM_1: IC2.13 POWER3.2 | length 23.7
  Top Layer w0.254: 29.972,22.733 30.734,22.733 33.676,25.675 IC2.13
  Top Layer w0.381: v1(17.526,21.717) 18.542,22.733 29.972,22.733
  Bottom Layer w0.508: POWER3.2@12.319,22.225 16.777,22.225 17.285,21.717 v1(17.526,21.717)
SW1_5: IC2.14 R16.2 SW1.1 | length 25.8
  Top Layer w0.254: 32.893,23.622 33.528,24.257 34.417,24.257 34.636,24.476 IC2.14
  Top Layer w0.381: R16.2 22.618,19.868 SW1.1@22.884,19.602 ; SW1.1@22.884,12.402 SW1.1@22.884,19.602 ; 32.893,23.622 30.988,21.717 23.107,21.717 22.884,21.494 SW1.1@22.884,19.602
SW2_5: IC2.20 R15.2 SW2.1 | length 18.2
  Top Layer w0.254: IC2.20 37.636,22.308 38.227,21.717
  Top Layer w0.381: 38.227,21.717 40.132,21.717 40.64,21.209 40.64,20.134 41.045,19.729 41.045,12.529 39.342,12.529 38.791,11.978 R15.2
TX: IC2.30 IC5.4 | length 34.4
  Top Layer w0.254: IC2.30 44.842,29.475 45.212,29.845
  Top Layer w0.381: 45.212,29.845 45.974,30.607 49.403,30.607 51.181,32.385 51.181,45.847 52.197,46.863 55.372,46.863 57.531,49.022 IC5.4
TX_TO_GSM_1: IC2.12 POWER3.1 | length 25.6
  Top Layer w0.254: 29.591,23.749 30.734,23.749 32.213,25.228 32.213,26.954 32.234,26.975 IC2.12
  Top Layer w0.381: POWER3.1 14.666,20 15.367,20.701 15.367,22.733 16.383,23.749 29.591,23.749

## Polygon pours and split planes (outlines as drawn)
GND_D on Bottom Layer "GND_D_L02_P002" (solid, remove dead copper, pour order 2): 34.671,67.564 34.798,67.437 36.703,67.437 37.211,66.929 37.211,63.881 43.815,57.277 43.815,44.196 38.735,39.116 13.589,39.116 10.414,35.941 10.414,12.319 12.573,10.16 64.008,10.16 64.643,10.795 64.643,69.088 64.389,69.342 34.544,69.342
GND_SW on Bottom Layer "GND_SW_L02_P000" (solid, remove dead copper, pour order 0): 35.179,63.627 35.052,63.754 32.131,63.754 31.75,63.373 31.75,59.309 30.353,57.912 18.669,57.912 16.256,55.499 16.256,39.878 17.399,38.735 23.495,38.735 26.543,41.783 32.004,41.783 33.782,40.005 38.608,40.005 41.021,42.418 41.021,44.196 43.053,46.228 43.053,55.626 42.037,56.642 37.084,56.642 35.687,58.039 35.687,63.119 35.56,63.119 35.179,63.5
GND_D on Top Layer "GND_D_L01_P003" (solid, remove dead copper, pour order 3): 35.052,67.437 35.179,67.31 37.084,67.31 37.592,66.802 37.592,63.754 44.196,57.15 44.196,42.291 40.894,38.989 13.97,38.989 10.795,35.814 10.795,12.192 12.954,10.033 64.389,10.033 65.024,10.668 65.024,68.961 64.389,69.596 35.306,69.596 34.925,69.215
GND_SW on Top Layer "GND_SW_L01_P001" (solid, remove dead copper, pour order 1): 35.192,63.605 35.065,63.732 32.144,63.732 31.763,63.351 31.763,59.287 30.366,57.89 18.682,57.89 16.269,55.477 16.269,39.856 17.412,38.713 23.508,38.713 26.556,41.761 32.017,41.761 33.795,39.983 39.891,39.983 41.796,41.888 41.796,44.936 43.066,46.206 43.066,55.604 42.05,56.62 37.097,56.62 35.7,58.017 35.7,63.097 35.573,63.097 35.192,63.478

## Keep-outs
Keep-Out Layer:
  the board outline again, w0.254

## Other copper
Top Layer:
  rectangle net +3.3_wifi: 53.594,40.64 56.388,42.545
  rectangle net +24_GSM: 11.049,49.276 13.843,58.039
  region net +3.3_wifi: 55.118,41.021 55.626,40.513 55.626,38.1 55.753,38.1 56.134,37.719 56.388,37.973 56.388,41.656 56.134,41.91
  region net +24: 27.94,57.15 27.94,59.055 27.813,59.182 24.765,59.182 23.241,57.658 19.177,57.658 18.034,56.515 18.034,54.483 18.542,53.975 19.939,53.975 21.717,52.197 21.717,52.07 16.764,52.07 16.002,52.832 16.002,57.658 16.383,58.039 17.78,58.039 19.685,59.944 28.067,59.944 28.448,59.563 28.448,56.769
  region net NetC14_2: 27.178,52.959 27.178,48.514 25.019,46.355 21.59,46.355 20.955,45.72 20.955,44.704 21.929,44.704 22.945,45.72 25.781,45.72 26.416,45.085 26.416,42.926 25.654,42.164 22.733,42.164 21.463,43.434 19.304,43.434 18.923,43.815 18.923,46.228 20.193,47.498 23.114,47.498 25.97,50.354 25.97,52.29 26.001,52.29 26.797,53.086
  region net +5: 30.226,44.196 30.353,44.323 36.576,44.323 36.957,43.942 36.957,42.672 30.353,42.672 29.972,43.053
  region net NetD1_A: 17.907,60.071 19.431,61.595 25.146,61.595 25.781,62.23 25.781,65.913 25.019,66.675 18.288,66.675 15.367,63.754 11.938,63.754 11.43,63.246 11.43,60.325 11.684,60.071
Bottom Layer:
  rectangle net +3.3_wifi: 53.594,40.894 56.388,42.545
  region net GND_GSM: 11.938,59.69 11.176,58.928 11.176,55.372 11.811,54.737 13.843,54.737 14.605,53.975 14.605,48.641 14.097,48.133 11.303,48.133 10.668,47.498 10.668,43.561 11.303,42.926 14.605,42.926 16.129,44.45 16.129,58.801 15.24,59.69
  region net GND: 30.099,62.992 32.258,62.992 32.639,63.373 32.639,64.135 33.02,64.516 35.306,64.516 35.56,64.77 35.56,66.167 35.179,66.548 33.655,66.548 33.528,66.675 33.528,68.834 33.274,69.088 29.464,69.088 28.067,67.691 28.067,62.865
  region net GND: 15.875,60.579 18.034,58.42 29.718,58.42 30.734,59.436 30.734,61.595 29.718,62.611 28.067,62.611 27.686,62.23 27.686,60.579 27.178,60.071 21.463,60.071 18.669,62.865 14.097,62.865 13.716,62.484 13.716,60.579

## Silkscreen, mask and mechanical layers (free items; w line width, h text height)
Top Overlay:
  lines w0.254: 10.081,66.977 13.081,66.977 ; 13.129,66.929 13.129,69.929

## Text inside footprints (layer, text, board x,y; h text height)
CAN1: Top Overlay "MSTBA 2,5" at 43.618,73.658 h0.7 r180
ESP1: Top Overlay "ESP8266" at 54.648,31.325 h1.52
RS1: Top Overlay "MSTBA 2,5" at 57.889,73.658 h0.7 r180